# EAGLE board motorshieldv4_jd (EAGLE 5.06)
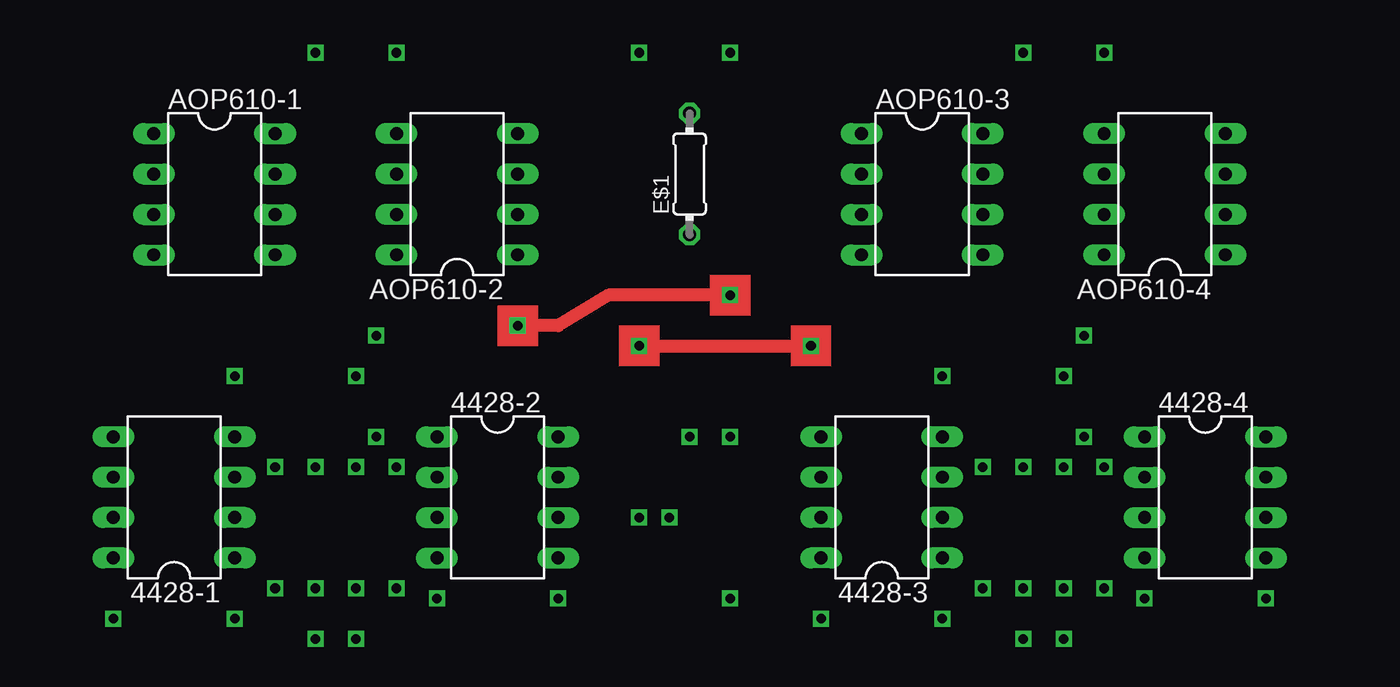
[diagram p0: board, top side]
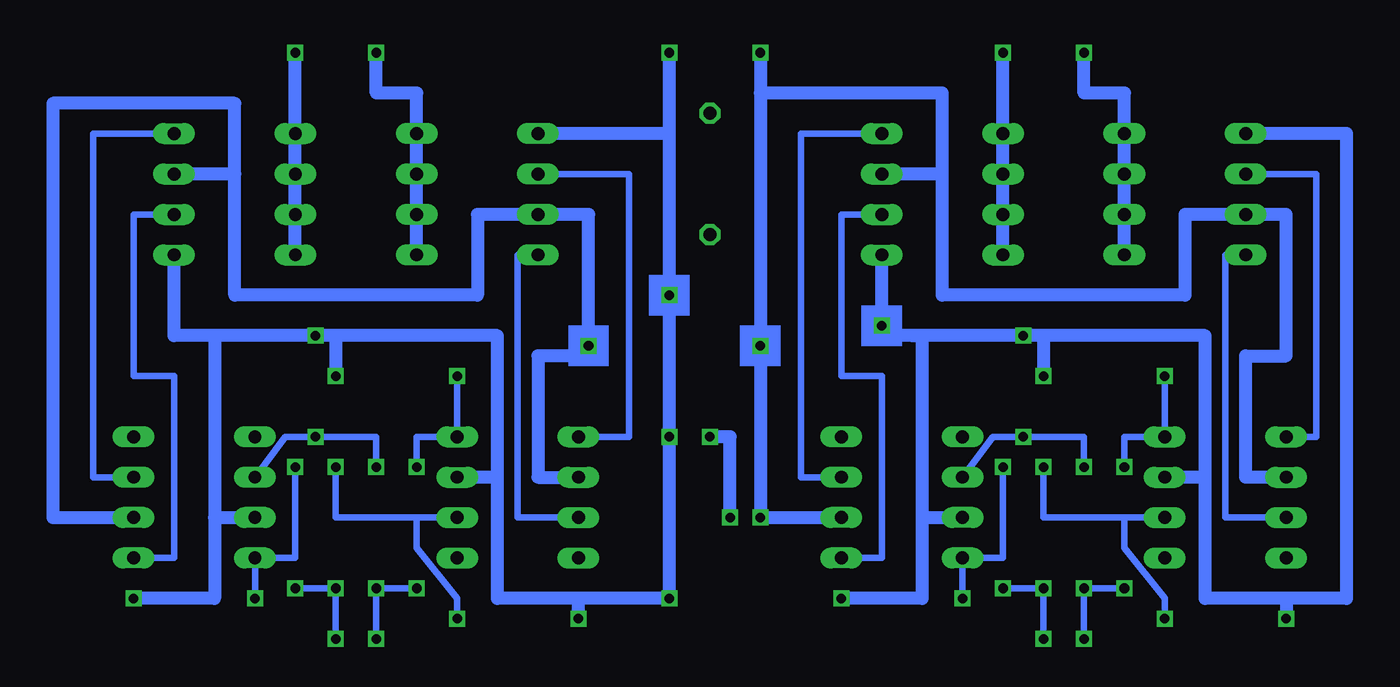
[diagram p1: board, bottom side, seen from below]

No outline drawn. Coordinates in mm, seen from the top.
Copper layers (1*16): Top 0.035mm / dielectric 1.5mm / Bottom 0.035mm
Design rules "default": minimum track width 10mil, minimum drill 24mil, track to track 8mil, track to pad 8mil, pad to pad 8mil, via to via 8mil, smd to smd 8mil, copper to edge 40mil, drill to drill 8mil, minimum pad ring 10mil, minimum via ring 8mil, stop-mask expansion 4mil, vias tented up to drill 0mil, thermal gap 10mil

## Footprints (pad centres in the part's own frame; a part is rotated, then mirrored left to right if it is on the bottom)
DIL08 = drill 0.813 long: 1 -3.81,-3.81; 2 -1.27,-3.81; 3 1.27,-3.81; 4 3.81,-3.81; 5 3.81,3.81; 6 1.27,3.81; 7 -1.27,3.81; 8 -3.81,3.81
0204/7 = drill 0.813 octagon: 1 -3.81,0; 2 3.81,0

## Placement (x,y rotation side)
4428-1  [DIL08]  31.75,41.91 90 top
4428-2  [DIL08]  52.07,41.91 270 top
4428-3  [DIL08]  76.2,41.91 90 top
4428-4  [DIL08]  96.52,41.91 270 top
AOP610-1  [DIL08]  34.29,60.96 270 top
AOP610-2  [DIL08]  49.53,60.96 90 top
AOP610-3  [DIL08]  78.74,60.96 270 top
AOP610-4  [DIL08]  93.98,60.96 90 top
E$1  [0204/7]  64.14,62.23 90 top

## Library data of the parts
4428-1-4428-4 AOP610-1-AOP610-4 = 40xx
E$1 = resistor

## Nets
+VDC: 4428-1.6 4428-2.6 4428-3.6 4428-4.6 AOP610-1.3 AOP610-2.3
GND: 4428-1.3 4428-2.3 4428-3.3 4428-4.3 AOP610-1.1 AOP610-2.1 AOP610-3.1
M1: AOP610-1.5 AOP610-1.6
M2: AOP610-2.5 AOP610-2.6 AOP610-2.7 AOP610-2.8
S$1: 4428-1.4
S$2: 4428-2.2
S$3: 4428-1.7 AOP610-1.4
S$4: 4428-2.4
S$11: 4428-1.5 AOP610-1.2
S$12: 4428-2.5 AOP610-2.2
S$13: 4428-2.7 AOP610-2.4
S$14: 4428-1.2
S$15: AOP610-1.7 AOP610-1.8
S$18: AOP610-3.5
S$19: 4428-3.7 AOP610-3.4
S$20: 4428-3.5 AOP610-3.2
S$21: 4428-4.7
S$22: 4428-4.5
S$32: 4428-4.4
S$35: 4428-3.4
S$38: 4428-4.2
S$39: 4428-3.2

## Tracks (layer width: path | path; a pad name or v marks a point on that pad's centre or on a via)
+VDC  (via drill 0.6)
  Top 0.813: v60.96,51.44 v71.75,51.44
  Bottom 0.813: 4428-4.6 105.41,40.64 105.41,66.67 93.98,66.67 93.98,62.23 | 93.98,62.23 97.79,62.23 | 93.98,62.23 93.98,54.61 78.74,54.61 78.74,59.69 71.75,59.69 v71.75,51.44 72.39,50.8 74.93,50.8 74.93,43.18 4428-3.6 | 4428-2.6 v60.96,40.64 v60.96,51.44 60.96,67.31 | 60.96,67.31 49.53,67.31 49.53,62.23 | 49.53,62.23 AOP610-2.3 | 49.53,62.23 49.53,54.61 34.29,54.61 34.29,59.69 AOP610-1.3 27.94,59.69 27.94,50.8 30.48,50.8 30.48,43.18 4428-1.6 | v60.96,69.85 60.96,67.31
GND  (via drill 0.6)
  Top 0.813: v66.67,54.61 59.05,54.61 55.88,52.7 v53.34,52.7
  Bottom 0.406: v44.45,52.07 50.8,52.07 | 36.83,52.07 38.1,52.07 | 36.83,52.07 43.18,52.07 | 33.02,52.07 36.83,52.07 | 95.25,52.07 v88.9,52.07
  Bottom 0.813: 50.8,40.64 50.8,35.56 v55.88,35.56 | 50.8,40.64 4428-2.3 | AOP610-2.1 v53.34,52.7 53.34,52.07 51.44,52.07 | 50.8,40.64 50.8,52.07 51.44,52.07 | 43.18,52.07 51.44,52.07 | 43.18,52.07 v43.18,49.53 | 43.18,52.07 v44.45,52.07 | 43.18,52.07 33.02,52.07 33.02,43.18 | 33.02,43.18 4428-1.3 | 33.02,43.18 33.02,35.56 27.94,35.56 | 27.94,35.56 v27.94,34.29 | AOP610-1.1 24.13,64.77 24.13,35.56 27.94,35.56 | v100.33,35.56 95.25,35.56 95.25,40.64 | 95.25,40.64 4428-4.3 | 97.79,57.15 97.79,52.07 95.25,52.07 | 95.25,52.07 95.25,40.64 | 87.63,52.07 95.25,52.07 | 87.63,52.07 v87.63,49.53 | 87.63,52.07 v88.9,52.07 | 87.63,52.07 77.47,52.07 77.47,43.18 | 66.67,64.77 AOP610-3.1 | 77.47,43.18 4428-3.3 | 77.47,43.18 77.47,35.56 72.39,35.56 | 66.67,64.77 v66.67,54.61 v66.67,45.72 v66.67,35.56 72.39,35.56 | 66.67,64.77 v66.67,69.85 | v72.39,34.29 72.39,35.56
M1  (via drill 0.6)
  Bottom 0.406: AOP610-1.5 AOP610-1.6 AOP610-1.5
  Bottom 0.813: AOP610-1.5 38.1,67.31 40.64,67.31 v40.64,69.85
M2
  Bottom 0.406: AOP610-2.6 AOP610-2.5 45.72,67.31 | AOP610-2.7 AOP610-2.8 45.72,67.31 | 45.72,67.31 45.72,69.85
  Bottom 0.813: AOP610-2.8 45.72,69.85
S$1  (via drill 0.6)
  Bottom 0.406: 4428-1.4 v35.56,49.53 4428-1.4 | 4428-1.4 38.1,45.72 v38.1,43.81
S$2  (via drill 0.6)
  Bottom 0.406: 4428-2.2 46.35,45.72 v44.45,45.72 40.64,45.72 v40.64,43.81
S$3
  Bottom 0.406: 4428-1.7 31.75,40.64 31.75,57.15 AOP610-1.4
S$4  (via drill 0.6)
  Bottom 0.406: v45.72,43.81 45.72,38.1 4428-2.4 v48.26,35.56
S$6  (via drill 0.6)
  Bottom 0.406: v40.64,33.02 v40.64,36.2 v38.1,36.2
S$7  (via drill 0.6)
  other vias: 43.18,33.02
S$8  (via drill 0.6)
  Bottom 0.406: v45.72,36.2 v43.18,36.2 43.18,33.02
S$10  (via drill 0.6)
  other vias: 45.72,69.85
S$11
  Bottom 0.406: 26.67,45.72 4428-1.5 26.04,45.72 26.04,62.23 AOP610-1.2
S$12
  Bottom 0.406: 4428-2.5 53.34,38.1 53.34,49.53 55.88,49.53 55.88,59.69 AOP610-2.2
S$13
  Bottom 0.406: 4428-2.7 58.42,43.18 58.42,64.77 AOP610-2.4
S$14  (via drill 0.6)
  Bottom 0.406: v35.56,34.29 35.56,35.56 38.1,38.73 38.1,40.64 | 38.1,40.64 4428-1.2 | 38.1,40.64 43.18,40.64 v43.18,43.81
S$15
  Bottom 0.406: AOP610-1.7 AOP610-1.8
S$16  (via drill 0.6)
  Bottom 0.813: 90.17,57.15 v90.17,69.85
S$17  (via drill 0.6)
  Bottom 0.813: v62.87,40.64 62.87,45.72 v64.14,45.72
S$18  (via drill 0.6)
  Bottom 0.813: AOP610-3.5 82.55,67.31 85.09,67.31 v85.09,69.85
S$19
  Bottom 0.406: 4428-3.7 76.2,40.64 76.2,57.15 AOP610-3.4
S$20
  Bottom 0.406: 4428-3.5 70.48,45.72 69.22,45.72 69.22,62.23 AOP610-3.2
S$21
  Bottom 0.406: 97.79,64.77 102.87,64.77 102.87,43.18 4428-4.7
S$22
  Bottom 0.406: 97.79,59.69 100.33,59.69 100.33,49.53 97.79,49.53 97.79,38.1 4428-4.5
S$28  (via drill 0.6)
  Bottom 0.406: v85.09,33.02 v85.09,36.2 v82.55,36.2
S$29  (via drill 0.6)
  Bottom 0.406: v87.63,33.02 v87.63,36.2 v90.17,36.2
S$32  (via drill 0.6)
  Bottom 0.406: v92.71,35.56 4428-4.4 90.17,38.1 v90.17,43.81
S$35  (via drill 0.6)
  Bottom 0.406: v82.55,43.81 82.55,45.72 4428-3.4 v80.01,49.53
S$38  (via drill 0.6)
  Bottom 0.406: v85.09,43.81 85.09,45.72 v88.9,45.72 90.81,45.72 4428-4.2
S$39  (via drill 0.6)
  Bottom 0.406: v87.63,43.81 87.63,40.64 82.55,40.64 | 82.55,40.64 82.55,38.73 80.01,35.56 v80.01,34.29 | 82.55,40.64 4428-3.2
(copper drawn outside any net)
  shapes: Bottom area x4, Top area x4